# EAGLE board Teensy_3_1 XBee Adapter (EAGLE 8.2.1)
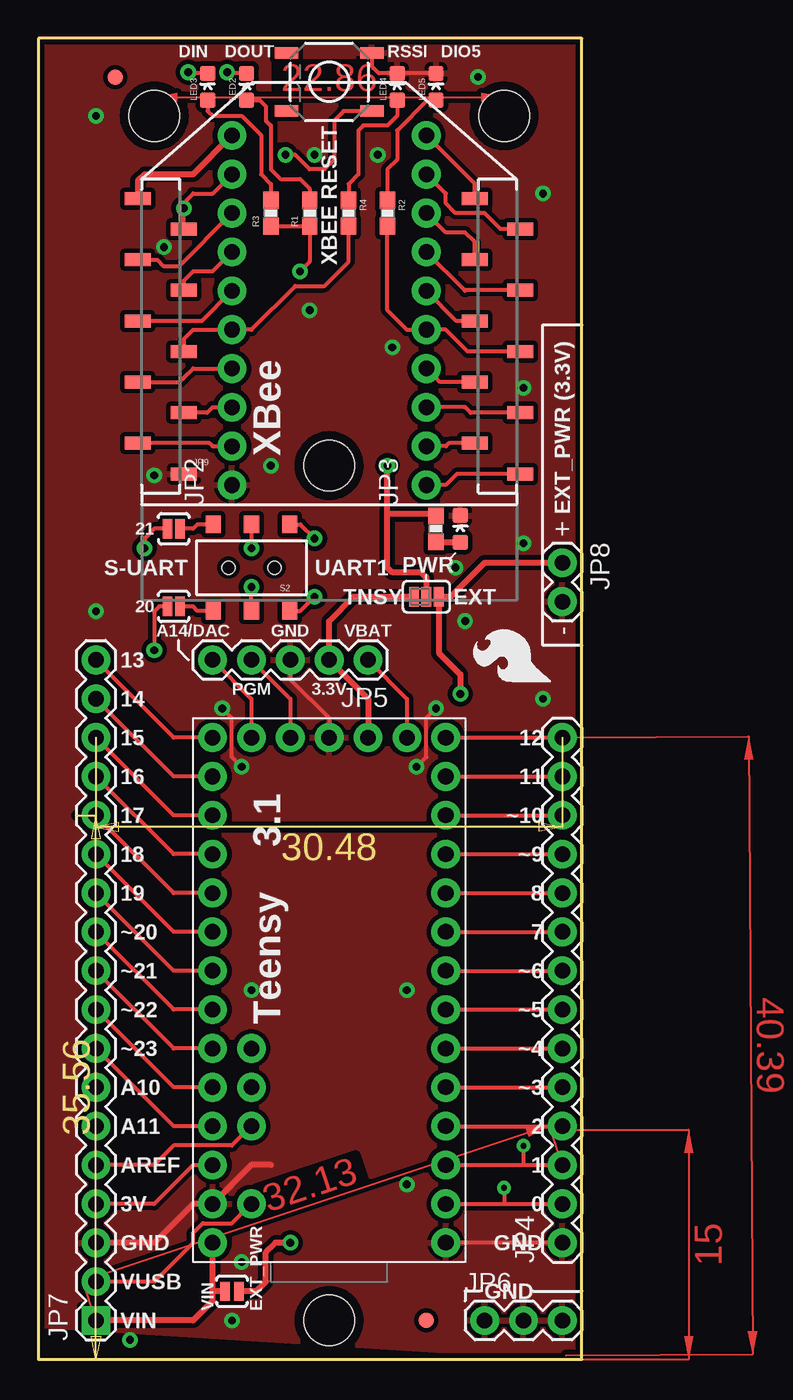
[diagram p0: board, top side]
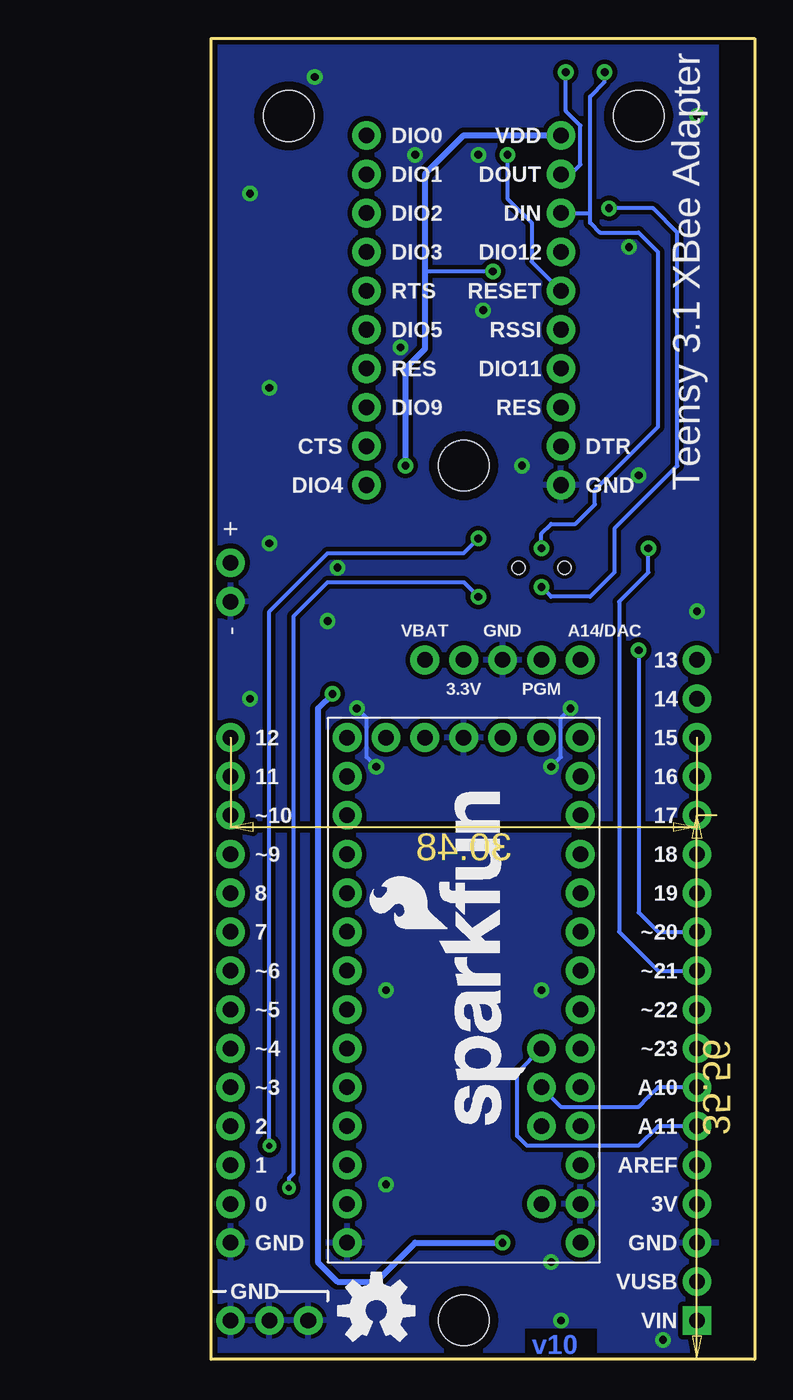
[diagram p1: board, bottom side, seen from below]

Size 35.52 x 86.36 mm. Coordinates in mm from the lower left corner, seen from the top.
Outline: 0,0 35.52,0 35.52,86.36 0,86.36 0,0
Copper layers (1*16): Top 0.035mm / dielectric 1.5mm / Bottom 0.035mm
Design rules "SparkFun-2-layer": minimum track width 7mil, minimum drill 15mil, track to track 8mil, track to pad 8mil, pad to pad 8mil, via to via 8mil, smd to smd 8mil, copper to edge 8mil, drill to drill 8mil, minimum pad ring 12mil, minimum via ring 10mil, stop-mask expansion 4mil, vias tented up to drill 20mil, thermal gap 10mil
Net classes: 0 default: width 0.203 mm; 1 vcc: width 0.254 mm

## Footprints (pad centres in the part's own frame; a part is rotated, then mirrored left to right if it is on the bottom)
FIDUCIAL-1X2 = smd 1 x 1: 1 0,0
TEENSY-3.1_NOSILK = drill 1.016 pad 1.88: 0 16.51,3.81; 1 16.51,6.35; 2 16.51,8.89; 3 16.51,11.43; 3.3V 11.43,34.29; 3V 1.27,6.35; 4 16.51,13.97; 5 16.51,16.51; 6 16.51,19.05; 7 16.51,21.59; 8 16.51,24.13; 9 16.51,26.67; 10 16.51,29.21; 11 16.51,31.75; 12 16.51,34.29; 13 1.27,34.29; 14 1.27,31.75; 15 1.27,29.21; 16 1.27,26.67; 17 1.27,24.13; 18 1.27,21.59; 19 1.27,19.05; 20 1.27,16.51; 21 1.27,13.97; 22 1.27,11.43; 23 1.27,8.89; A10 3.81,11.43; A11 3.81,13.97; A14/DAC 3.81,34.29; AGND 1.27,3.81; AREF 3.81,8.89; GND 8.89,34.29; GND1 16.51,1.27; PROG 6.35,34.29; VBAT 13.97,34.29; VIN 1.27,1.27; VUSB 3.81,3.81
1X10_NO_SILK = drill 1.016 pad 1.88: 1 0,0; 2 2.54,0; 3 5.08,0; 4 7.62,0; 5 10.16,0; 6 12.7,0; 7 15.24,0; 8 17.78,0; 9 20.32,0; 10 22.86,0
1X14 = drill 1.016 pad 1.88: 1 0,0; 2 2.54,0; 3 5.08,0; 4 7.62,0; 5 10.16,0; 6 12.7,0; 7 15.24,0; 8 17.78,0; 9 20.32,0; 10 22.86,0; 11 25.4,0; 12 27.94,0; 13 30.48,0; 14 33.02,0
1X05 = drill 1.016 pad 1.88: 1 0,0; 2 2.54,0; 3 5.08,0; 4 7.62,0; 5 10.16,0
1X03 = drill 1.016 pad 1.88: 1 0,0; 2 2.54,0; 3 5.08,0
1X18 = drill 1.016 pad 1.88 square: 1 0,0 | drill 1.016 pad 1.88: 2 2.54,0; 3 5.08,0; 4 7.62,0; 5 10.16,0; 6 12.7,0; 7 15.24,0; 8 17.78,0; 9 20.32,0; 10 22.86,0; 11 25.4,0; 12 27.94,0; 13 30.48,0; 14 33.02,0; 15 35.56,0; 16 38.1,0; 17 40.64,0; 18 43.18,0
1X02 = drill 1.016 pad 1.88: 1 0,0; 2 2.54,0
XBEE-SMD = smd 1.7 x 0.85: 1 -12.5,20; 2 -9.5,18; 3 -12.5,16; 4 -9.5,14; 5 -12.5,12; 6 -9.5,10; 7 -12.5,8; 8 -9.5,6; 9 -12.5,4; 10 -9.5,2; 11 12.5,2; 12 9.5,4; 13 12.5,6; 14 9.5,8; 15 12.5,10; 16 9.5,12; 17 12.5,14; 18 9.5,16; 19 12.5,18; 20 9.5,20
LED-0603 = smd 1 x 1: A 0,-0.877; C 0,0.877
0603-RES = smd 1.1 x 1: 1 -0.85,0; 2 0.85,0
AYZ0202 = smd 1 x 1.15: 1 -2.5,2.825; 2 0,2.825; 3 2.5,2.825; 4 -2.5,-2.825; 5 0,-2.825; 6 2.5,-2.825 | hole 0.85: 1.5,0; -1.5,0
TACTILE-SWITCH-SMD = smd 1.524 x 0.762: 1 -2.794,1.905; 2 2.794,1.905; 3 -2.794,-1.905; 4 2.794,-1.905
PAD-JUMPER-2-NC_BY_PASTE_YES_SILK = smd 0.635 x 1.27: 1 -0.401,0; 2 0.413,0
PAD-JUMPER-3-2OF3_NC_BY_PASTE_YES_SILK_FULL_BOX = smd 0.635 x 1.27: 1 -0.813,0; 2 0,0; 3 0.813,0
PAD-JUMPER-2-NO_YES_SILK = smd 0.635 x 1.27: 1 -0.45,0; 2 0.45,0
STAND-OFF = hole 3.302: 0,0

## Placement (x,y rotation side)
FID1  FIDUCIAL1X2  [FIDUCIAL-1X2]  25.36,2.54 0 top
FID2  FIDUCIAL1X2  [FIDUCIAL-1X2]  5.04,83.82 0 top
FRAME1  [CREATIVE_COMMONS]  71.08,34.29 0 top  (outside the outline)
JP1  TEENSY-3.1NOSILK  [TEENSY-3.1_NOSILK]  10.12,6.35 0 top
JP2  [1X10_NO_SILK]  12.66,57.15 90 top
JP3  [1X10_NO_SILK]  25.36,57.15 90 top
JP4  DNP  [1X14]  34.25,7.62 90 top
JP5  DNP  [1X05]  21.55,45.72 180 top
JP6  DNP  [1X03]  29.17,2.54 0 top
JP7  DNP\  [1X18]  3.77,2.54 90 top
JP8  DNP  [1X02]  34.25,52.07 270 top
JP9  CONN-09042  [XBEE-SMD]  19.01,55.88 0 top
LED1  Red  [LED-0603]  27.58,54.29 0 top
LED2  Red  [LED-0603]  13.61,83.19 0 top
LED3  Green  [LED-0603]  11.07,83.19 0 top
LED4  Green  [LED-0603]  23.45,83.19 0 top
LED5  Green  [LED-0603]  26,83.19 0 top
LOGO1  SFE_LOGO_FLAME.2_INCH  [SFE_LOGO_FLAME_.2]  33.77,43.97 90 top
LOGO2  OSHW-LOGOM  [OSHW-LOGO-M]  24.73,3.17 0 bottom
LOGO3  SFE_LOGO_NAME_FLAME.2_INCH  [SFE_LOGO_NAME_FLAME_.2]  14.88,14.61 90 bottom
R1  1k  [0603-RES]  17.74,74.93 90 top
R2  1k  [0603-RES]  22.82,74.93 270 top
R3  1k  [0603-RES]  15.2,74.93 90 top
R4  1k  [0603-RES]  20.28,74.93 270 top
R11  1k  [0603-RES]  26,54.29 90 top
S2  DPDT  [AYZ0202]  13.93,51.75 180 top
S3  Reset  [TACTILE-SWITCH-SMD]  19.01,83.5 180 top
SJ1  D_TX  [PAD-JUMPER-2-NC_BY_PASTE_YES_SILK]  8.85,54.29 0 top
SJ3  D_RX  [PAD-JUMPER-2-NC_BY_PASTE_YES_SILK]  8.85,49.21 0 top
SJ4  JUMPER-PAD-3-2OF3_NC_BY_PASTE  [PAD-JUMPER-3-2OF3_NC_BY_PASTE_YES_SILK_FULL_BOX]  25.36,49.85 180 top
SJ5  EXT_JPR  [PAD-JUMPER-2-NO_YES_SILK]  12.66,4.45 0 top
STANDOFF1  STAND-OFF  [STAND-OFF]  30.44,81.28 0 top
STANDOFF2  STAND-OFF  [STAND-OFF]  7.58,81.28 0 top
STANDOFF3  STAND-OFF  [STAND-OFF]  19.01,2.54 0 top
STANDOFF4  STAND-OFF  [STAND-OFF]  19.01,58.42 0 top

## Library data of the parts
FID1 FID2 LOGO1-LOGO3 = SparkFun-Aesthetics
FRAME1 = SparkFun-Aesthetics; DESIGNER: Marshall Taylor; VERSION: v10
JP1 = Testing
JP2 JP3 = SparkFun-Connectors; PROD_ID: CONN-11563
JP4-JP8 = SparkFun-Connectors
JP9 = SparkFun-RF; PROD_ID: CONN-09042
LED1 LED2 = SparkFun-LED; PROD_ID: DIO-00819
LED3-LED5 = SparkFun-LED; PROD_ID: DIO-00821
R1-R4 R11 = SparkFun-Resistors; PROD_ID: RES-07856
S2 = SparkFun-Electromechanical; PROD_ID: SWCH-08179
S3 = SparkFun-Electromechanical; PROD_ID: SWCH-08247
SJ1 SJ3-SJ5 = SparkFun-Passives
STANDOFF1-STANDOFF4 = SparkFun-Electromechanical

## Nets
2: JP1.2 JP4.4
3: JP1.3 JP4.5
3.3V: JP1.3.3V JP5.2 SJ4.3
3V: JP1.3V JP7.4
4: JP1.4 JP4.6
5: JP1.5 JP4.7
6: JP1.6 JP4.8
7/RX3: JP1.7 JP4.9
8/TX3: JP1.8 JP4.10
9/RX2: JP1.9 JP4.11
10/TX2/CS: JP1.10 JP4.12
11/DOUT: JP1.11 JP4.13
12/DIN: JP1.12 JP4.14
13/SCK: JP1.13 JP7.18
A0/14: JP1.14 JP7.17
A1/15: JP1.15 JP7.16
A2/16: JP1.16 JP7.15
A3/17: JP1.17 JP7.14
A4/18/SDA0: JP1.18 JP7.13
A5/19/SCL0: JP1.19 JP7.12
A6/20: JP1.20 JP7.11 SJ3.1
A7/21: JP1.21 JP7.10 SJ1.1
A8/22: JP1.22 JP7.9
A9/23: JP1.23 JP7.8
A10: JP1.A10 JP7.7
A11: JP1.A11 JP7.6
A14/DAC: JP1.A14/DAC JP5.5
AREF: JP1.AREF JP7.5
CTS: JP3.2 JP9.12
DIO0: JP3.10 JP9.20
DIO1: JP3.9 JP9.19
DIO2: JP3.8 JP9.18
DIO3: JP3.7 JP9.17
DIO4: JP3.1 JP9.11
DIO5: JP3.5 JP9.15 R2.2
DIO9: JP3.3 JP9.13
DIO11: JP2.4 JP9.7
DIO12: JP2.7 JP9.4
DTR: JP2.2 JP9.9
EXT_3.3V [vcc]: JP8.1 SJ4.1 SJ5.2
GND: JP1.AGND JP1.GND JP1.GND1 JP2.1 JP4.1 JP5.3 JP6.1 JP6.2 JP6.3 JP7.3 JP8.2 JP9.10 LED1.C LED4.C LED5.C S3.3
IN: JP2.8 JP9.3 LED3.C S2.5
N$12: LED1.A R11.1
N$17: LED2.A R1.2
N$19: LED3.A R3.2
N$43: LED4.A R4.1
N$139: LED5.A R2.1
N$140: S2.6 SJ1.2
N$141: S2.3 SJ3.2
OUT: JP2.9 JP9.2 LED2.C S2.2
PROG: JP1.PROG JP5.4
RES: JP2.3 JP9.8
RES2: JP3.4 JP9.14
RESET: JP2.6 JP9.5 S3.1
RSSI: JP2.5 JP9.6 R4.2
RTS: JP3.6 JP9.16
UART_RX: JP1.0 JP4.2 S2.1
UART_TX: JP1.1 JP4.3 S2.4
VBAT: JP1.VBAT JP5.1
VIN: JP1.VIN JP7.1 SJ5.1
VUSB: JP1.VUSB JP7.2
XBEE_VDD: JP2.10 JP9.1 R1.1 R3.1 R11.2 SJ4.2

## Tracks (layer width: path | path; a pad name or v marks a point on that pad's centre or on a via)
2
  Top 0.254: JP1.2 JP4.4
3
  Top 0.254: JP1.3 JP4.5
3.3V
  Top 0.406: JP1.3.3V 21.55,43.18 JP5.2 19.01,48.26 20.6,49.85 SJ4.3
3V
  Top 0.254: JP1.3V 10.12,12.7 7.58,10.16 JP7.4
4
  Top 0.254: JP1.4 JP4.6
5
  Top 0.254: JP1.5 JP4.7
6
  Top 0.254: JP1.6 JP4.8
7/RX3
  Top 0.254: JP1.7 JP4.9
8/TX3
  Top 0.254: JP1.8 JP4.10
9/RX2
  Top 0.254: JP1.9 JP4.11
10/TX2/CS
  Top 0.254: JP1.10 JP4.12
11/DOUT
  Top 0.254: JP1.11 JP4.13
12/DIN
  Top 0.254: JP1.12 JP4.14
13/SCK
  Top 0.254: JP1.13 8.85,40.64 JP7.18
A0/14
  Top 0.254: JP1.14 8.85,38.1 JP7.17
A1/15
  Top 0.254: JP1.15 8.85,35.56 JP7.16
A2/16
  Top 0.254: JP1.16 8.85,33.02 JP7.15
A3/17
  Top 0.254: JP1.17 8.85,30.48 JP7.14
A4/18/SDA0
  Top 0.254: JP1.18 8.85,27.94 JP7.13
A5/19/SCL0
  Top 0.254: JP1.19 8.85,25.4 JP7.12
A6/20  (via drill 0.51)
  Top 0.254: JP1.20 8.85,22.86 JP7.11 | SJ3.1 7.9,49.21 7.58,48.9 v7.58,46.35
  Bottom 0.254: v7.58,46.35 7.58,29.21 6.31,27.94 JP7.11
A7/21  (via drill 0.51)
  Top 0.254: JP1.21 8.85,20.32 JP7.10 | SJ1.1 7.58,54.29 6.95,53.66 v6.95,53.02
  Bottom 0.254: v6.95,53.02 6.95,51.44 8.85,49.53 8.85,27.94 6.31,25.4 JP7.10
A8/22
  Top 0.254: JP1.22 8.85,17.78 JP7.9
A9/23
  Top 0.254: JP1.23 8.85,15.24 JP7.8
A10
  Bottom 0.254: JP1.A10 12.66,16.51 7.58,16.51 6.95,17.14 6.31,17.78 JP7.7
A11
  Bottom 0.254: JP1.A11 15.52,18.73 15.52,14.61 14.88,13.97 7.58,13.97 6.31,15.24 JP7.6
A14/DAC
  Top 0.254: JP5.5 13.93,43.18 JP1.A14/DAC
AREF
  Top 0.254: JP1.AREF 12.66,13.97 8.85,13.97 7.58,12.7 JP7.5
CTS
  Top 0.254: JP3.2 26.63,59.69 26.82,59.88 JP9.12
DIO0
  Top 0.254: JP3.10 28.51,76.86 JP9.20
DIO1
  Top 0.254: JP3.9 26.63,76.2 26.63,75.56 27.27,74.93 29.17,74.93 30.22,73.88 JP9.19
DIO2
  Top 0.254: JP3.8 26.63,73.66 27.9,73.66 28.51,73.05 JP9.18
DIO3
  Top 0.254: 27.93,69.88 27.9,69.85 | 27.93,69.88 27.87,69.88 JP3.7 | JP9.17 27.93,69.88
DIO4
  Top 0.254: JP3.1 26.63,57.15 27.36,57.88 JP9.11
DIO5
  Top 0.254: R2.2 22.82,68.58 24.09,67.31 JP3.5 26.63,67.31 28.06,65.88 JP9.15
DIO9
  Top 0.254: JP3.3 27.9,62.23 28.25,61.88 JP9.13
DIO11
  Top 0.254: JP2.4 10.12,64.77 9.48,64.14 9.23,63.88 JP9.7
DIO12
  Top 0.254: JP2.7 11.39,71.12 10.12,71.12 9.51,70.51 JP9.4
DTR
  Top 0.254: JP2.2 11.39,59.69 11.2,59.88 JP9.9
EXT_3.3V  (via drill 0.51)
  Top 0.406: v27.58,43.5 27.58,44.77 26.17,46.18 SJ4.1 26.95,49.85 29.17,52.07 JP8.1 | v16.47,7.62 15.52,7.62 14.88,6.99 14.88,5.08 14.25,4.45 SJ5.2
  Bottom 0.406: v27.58,43.5 28.54,42.55 28.54,6.35 27.27,5.08 24.73,5.08 22.18,7.62 v16.47,7.62
GND  (via drill 0.51)
  Top 0.254: JP4.1 JP1.GND1 | JP5.3 16.47,44.45 19.01,41.91 JP1.GND | v13.29,38.73 12.66,39.37 12.66,41.91 v12.03,42.55 | v24.73,38.73 25.36,39.37 25.36,41.91 v26,42.55 | LED5.C LED4.C 22.26,84.06 21.8,84.52 S3.3
  Top 0.406: 15.2,12.7 13.93,12.7 JP1.AGND 10.12,10.16 7.58,7.62 JP7.3
  Bottom 0.254: v13.29,38.73 12.66,39.37 12.66,41.91 v12.03,42.55 | v24.73,38.73 25.36,39.37 25.36,41.91 v26,42.55
  other vias: 13.29,6.35 27.9,48.26 12.66,2.54 3.77,48.9 17.74,68.58 27.27,51.75 3.77,81.28 31.71,63.5 7.58,57.78 23.14,66.15 15.2,58.42 24.09,11.43 22.18,78.74 32.98,76.2 5.99,1.27 24.09,24.13 28.74,83.83 32.98,43.18 31.71,53.34 13.93,24.13 18.06,78.74 8.21,72.71
  pour Top (isolate 0.305): -5,88.86 35.52,86.36 35.52,0 -5,2.5
  pour Bottom (isolate 0.305): 2.5,86.36 35.52,86.36 35.52,0 15.2,0 15.2,2.22 10.12,2.22 10.12,0 2.5,0
  pour Bottom (isolate 0.305): 2.5,86.36 35.52,86.36 35.52,0 15.2,0 15.2,2.22 10.12,2.22 10.12,0 2.5,0
IN  (via drill 0.51)
  Top 0.254: S2.5 v13.93,53.02 | LED3.C 9.88,84.06 v9.8,84.14 | JP9.3 7.77,71.88 8.21,71.44 9.17,71.44 JP2.8
  Bottom 0.254: v13.93,53.02 13.93,53.98 13.29,54.61 11.71,54.61 10.44,55.88 10.44,56.83 6.31,60.96 6.31,72.39 7.58,73.66 10.12,73.66 10.76,74.3 10.76,74.93 | 10.76,74.93 10.76,82.55 9.8,83.5 v9.8,84.14 | JP2.8 10.76,74.93
N$12
  Top 0.406: R11.1 26,53.42 LED1.A
N$17
  Top 0.254: R1.2 17.74,76.52 17.11,77.15 15.84,77.15 15.2,77.79 15.2,80.64 14.88,80.96 14.88,81.92 14.49,82.31 LED2.A
N$19
  Top 0.254: LED3.A 11.07,81.6 11.39,81.28 13.29,81.28 14.56,80.01 14.56,77.47 15.2,76.83 R3.2
N$43
  Top 0.254: LED4.A 23.45,81.28 22.82,80.64 21.23,80.64 20.91,80.33 20.91,77.47 20.28,76.83 R4.1
N$139
  Top 0.254: LED5.A 25.44,82.31 23.45,80.33 23.45,78.42 22.82,77.79 R2.1
N$140
  Top 0.254: SJ1.2 10.12,54.29 10.41,54.58 S2.6
N$141
  Top 0.254: S2.3 10.72,48.93 10.41,48.93 10.12,49.21 SJ3.2
OUT  (via drill 0.51)
  Top 0.254: 13.29,83.82 13.54,84.06 LED2.C 12.42,84.06 v12.34,84.14 | S2.2 v13.93,50.48 | JP2.9 11.39,76.2 10.12,76.2 9.51,75.59 v9.51,75.25 JP9.2
  Bottom 0.254: v9.51,75.25 6.63,75.25 5.04,73.66 5.04,58.42 9.17,54.29 9.17,51.44 10.76,49.85 13.29,49.85 v13.93,50.48 | v12.34,84.14 12.34,81.6 11.39,80.64 11.39,78.11 12.03,77.47 JP2.9
PROG
  Top 0.254: JP5.4 16.47,43.18 JP1.PROG
RES
  Top 0.254: JP2.3 11.39,62.23 11.04,61.88 JP9.8
RES2
  Top 0.254: JP3.4 26,64.14 26.25,63.88 JP9.14
RESET  (via drill 0.51)
  Top 0.254: v16.15,78.74 16.79,78.74 17.74,77.79 18.69,77.79 19.33,78.42 19.33,80.96 19.96,81.6 S3.1 | JP2.6 10.69,67.88 JP9.5
  Bottom 0.254: v16.15,78.74 16.15,75.88 14.56,74.3 14.56,71.75 JP2.6
RSSI
  Top 0.254: R4.2 20.28,71.75 18.69,70.17 16.79,70.17 13.93,67.31 JP2.5 10.12,67.31 9.51,66.7 JP9.6
RTS
  Top 0.254: JP3.6 27.33,67.88 JP9.16
UART_RX  (via drill 0.38, 0.51)
  Top 0.254: S2.1 17.14,48.93 v18.06,49.85 | JP1.0 30.44,10.16 | v30.44,11.21 30.44,10.16 | 30.44,10.16 JP4.2
  Bottom 0.254: v18.06,49.85 19.01,50.8 27.9,50.8 30.12,48.58 30.12,12.16 30.44,11.84 v30.44,11.21
UART_TX  (via drill 0.38, 0.51)
  Top 0.254: S2.4 17.14,54.58 v18.06,53.66 | JP1.1 31.71,12.7 | v31.71,13.96 31.71,12.7 | 31.71,12.7 JP4.3
  Bottom 0.254: v31.71,13.96 31.71,48.9 27.9,52.7 19.01,52.7 v18.06,53.66
VBAT
  Top 0.254: JP5.1 24.09,43.18 JP1.VBAT
VIN
  Top 0.406: 11.39,4.45 11.39,3.81 10.12,2.54 JP7.1 | 11.39,4.45 JP1.VIN | SJ5.1 11.39,4.45
VUSB
  Top 0.254: JP1.VUSB 12.66,8.89 10.76,8.89 10.12,8.26 10.12,7.62 7.58,5.08 JP7.2
XBEE_VDD  (via drill 0.51)
  Top 0.254: R3.1 R1.1 17.74,71.75 v17.11,71.12
  Top 0.406: SJ4.2 25.36,51.12 25.04,51.44 23.14,51.44 22.82,51.75 22.82,55.24 | JP2.10 10.12,77.47 6.95,77.47 6.51,77.03 JP9.1 | 22.82,55.24 v22.82,58.42 | R11.2 25.89,55.24 22.82,55.24
  Bottom 0.254: 21.55,71.12 v17.11,71.12
  Bottom 0.406: v22.82,58.42 22.82,64.77 21.55,66.04 21.55,71.12 21.55,77.47 19.01,80.01 JP2.10
(copper drawn outside any net)
  shapes: Top area x4

## Text on the board
Bottom: v10
tPlace: DIN | DOUT | RSSI | DIO5 | XBEE RESET | XBee | EXT_PWR (3.3V) | 21 | + | S-UART | UART1 | PWR | TNSY | EXT | 20 | A14/DAC | GND | VBAT | - | 13 | PGM | 3.3V | 14 | 15 | 12 | 16 | 11 | 17 | ~10 | 18 | 3.1 | ~9 | 19 | 8 | ~20 | 7 | ~21 | ~6 | ~22 | ~5 | Teensy | ~23 | ~4 | A10 | ~3 | A11 | 2 | AREF | 1 | 3V | 0 | GND | GND | VUSB | GND | VIN | VIN | EXT_PWR
bPlace: Teensy 3.1 XBee Adapter | VDD | DIO0 | DOUT | DIO1 | DIN | DIO2 | DIO12 | DIO3 | RESET | RTS | RSSI | DIO5 | DIO11 | RES | RES | DIO9 | DTR | CTS | GND | DIO4 | + | A14/DAC | GND | VBAT | - | 13 | PGM | 3.3V | 14 | 15 | 12 | 16 | 11 | 17 | ~10 | 18 | ~9 | 19 | 8 | ~20 | 7 | ~21 | ~6 | ~22 | ~5 | ~23 | ~4 | A10 | ~3 | A11 | 2 | AREF | 1 | 3V | 0 | GND | GND | VUSB | GND | VIN
Measures: Units in inches